# Altium PCB InvTrifasico.PcbDoc
Units mm, origin at the board's own origin, x right, y up, seen from the top; angles counter-clockwise.
Board outline 100 x 100 mm, 2 copper layers (Top Layer, Bottom Layer); 79 components, 43 nets, 284 pads, 0 vias.
Unrouted connection lines stored in the file: 12.
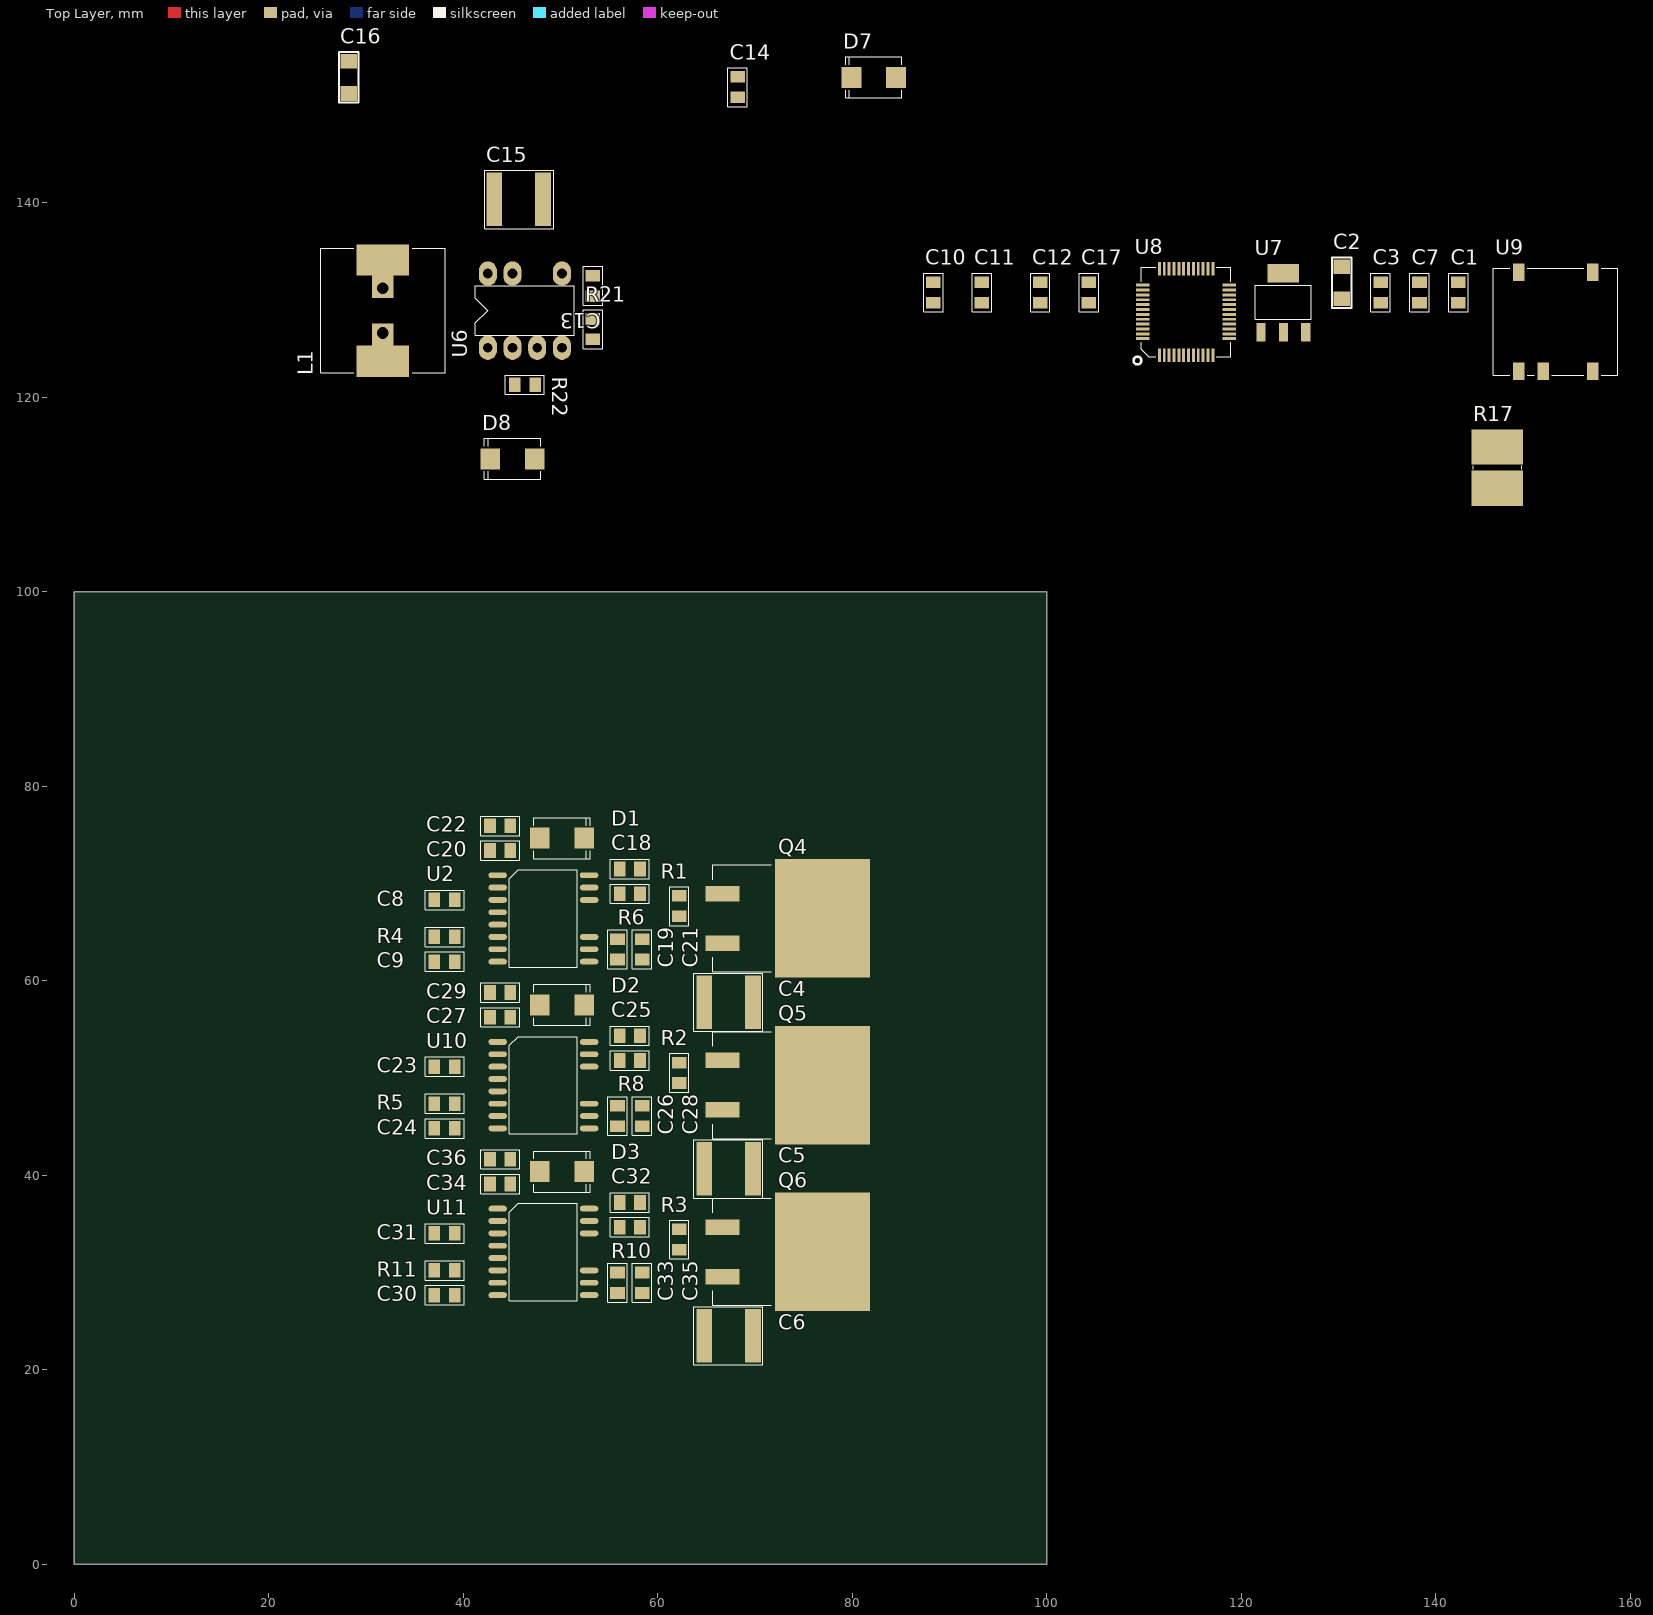
[diagram p0: Top Layer view]
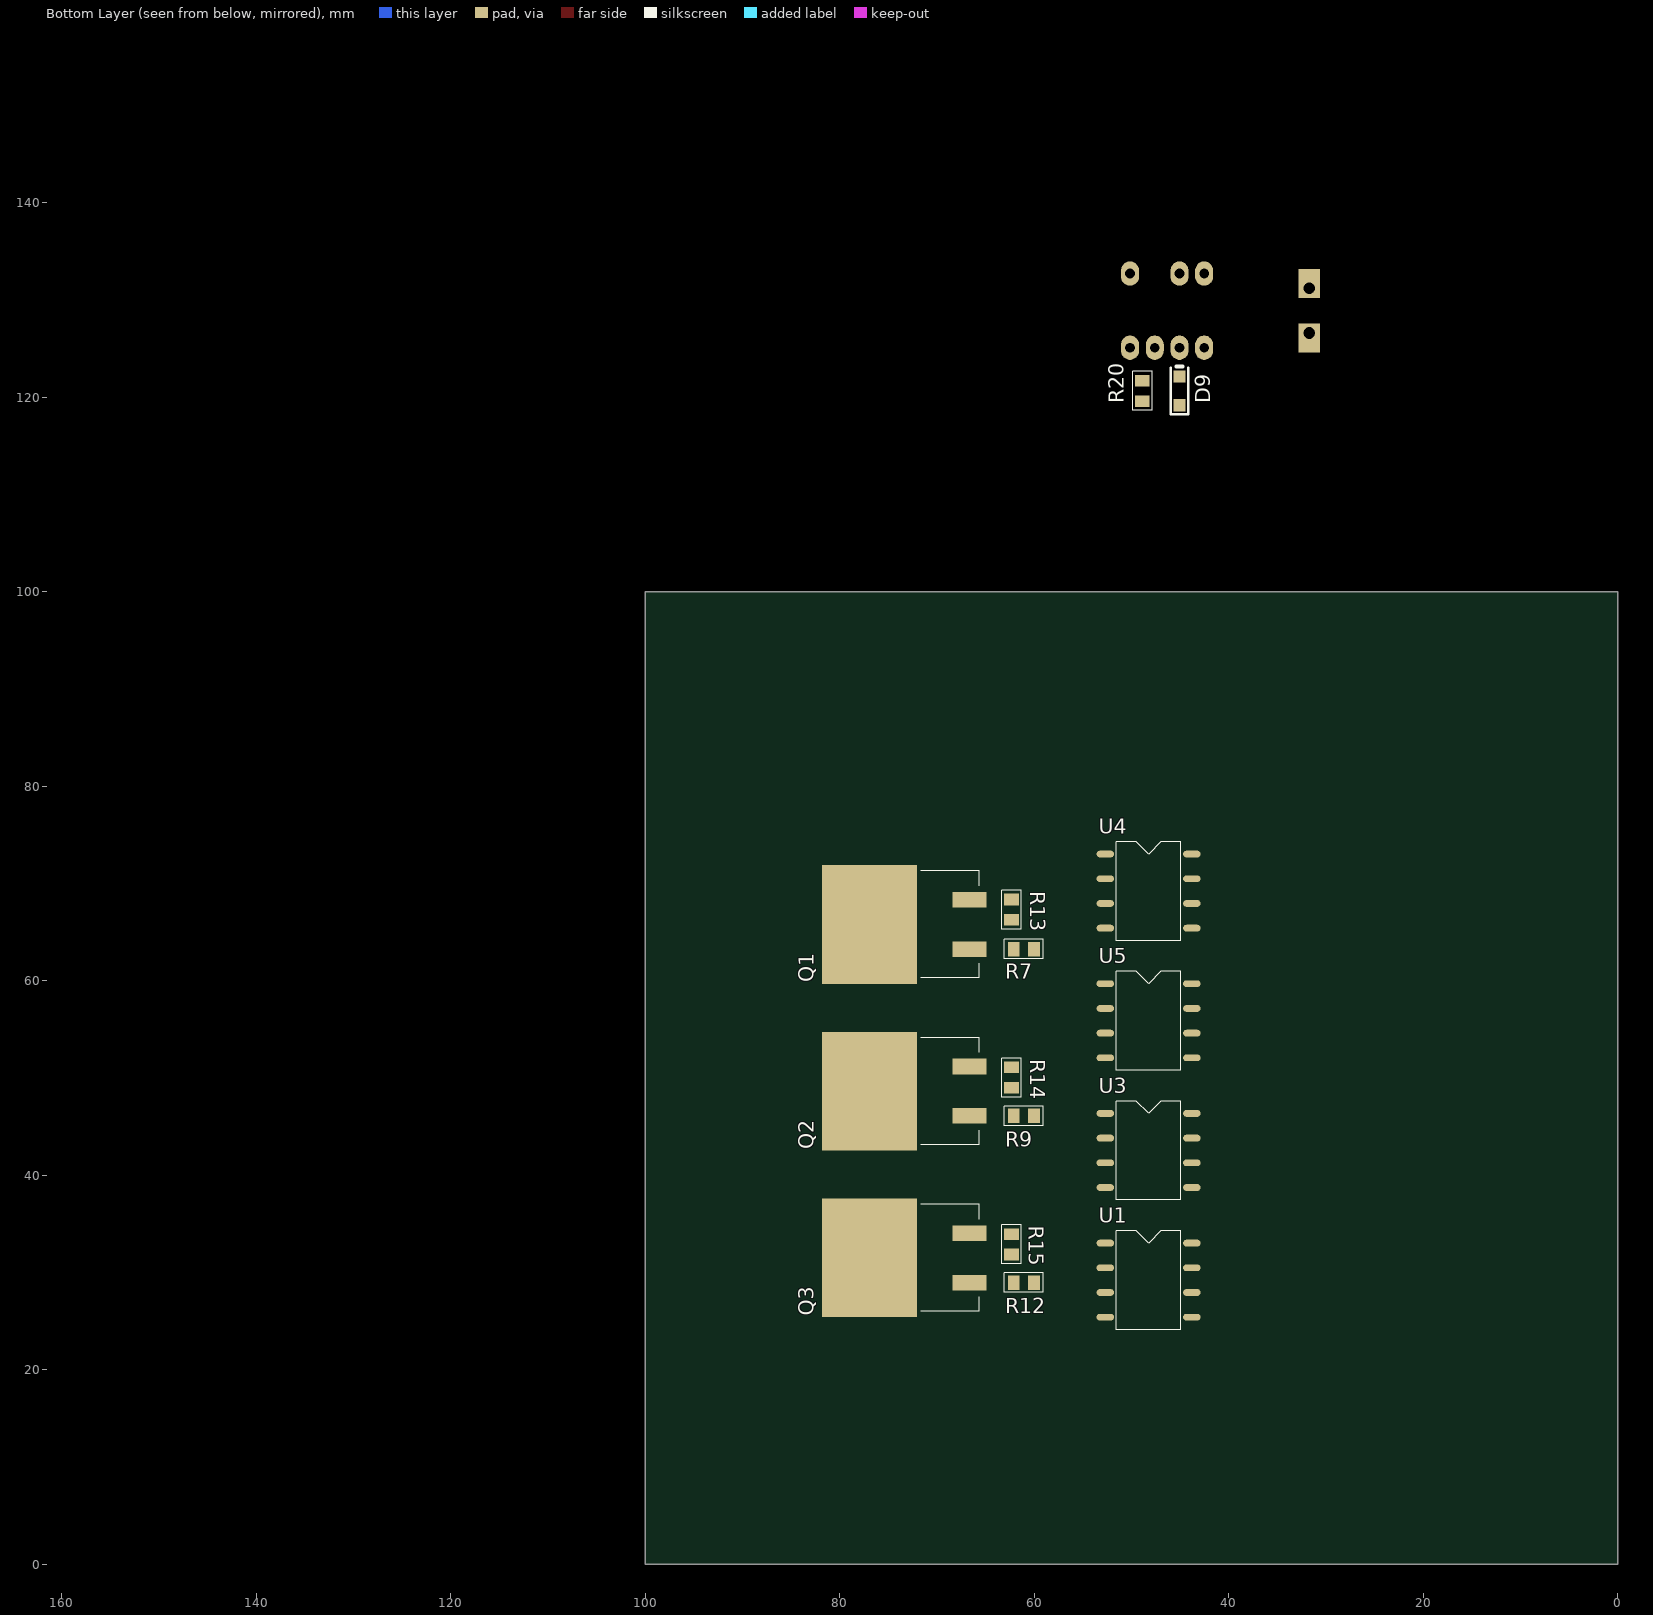
[diagram p1: Bottom Layer view, seen from below]

## Layer stack, top to bottom
Top Solder: solder mask 0.0102, Solder Resist, Dk 3.5
Top Layer: signal copper 0.0356
Dielectric 1: dielectric 0.32, FR-4, Dk 4.8
Bottom Layer: signal copper 0.0356
Bottom Solder: solder mask 0.0102, Solder Resist, Dk 3.5

## Board outline
0,0 100,0 100,100 0,100

## Design rules (kind name [scope] priority, off if disabled: settings)
Clearance [All] p1: gap=0.254 ignorepadtopadclearanceinfootprint=FALSE except(0: Arc-Hole Track-Hole SMDPad-Hole THPad-Hole Via-Hole Fill-Hole Poly-Hole Region-Hole Text-Hole)
PolygonConnect [All] p1: connectstyle=Relief reliefconductorwidth=0.254 reliefentries=4 polygonreliefangle="90 Angle" airgapwidth=0.254
RoutingVias [All] p1: holewidth=0.711 width=1.27 viastyle="Through Hole" minholewidth=0.711 minwidth=1.27 maxholewidth=0.711 maxwidth=1.27
SolderMaskExpansion [All] p1: expansion=0.102
Width [All] p1: maxlimit=0.254 minlimit=0.254 preferedwidth=0.254
30 further rules are at their usual default settings.

## Classes and differential pairs
component class Signal: C1 C2 C3 C7 C10 C11 C12 C17 U7 U8 U9
component class Power: C4 C5 C6 C8 C9 C13 C14 C15 C16 C18 C19 C20 C21 C22 C23 C24 C25 C26 C27 C28 C29 C30 C31 C32 C33 C34 C35 C36 D1 D2 D3 D7 D8 D9 L1 Q1 Q2 Q3 Q4 Q5 Q6 R1 R2 R3 R4 R5 R6 R7 R8 R9 R10 R11 R12 R13 R14 R15 R17 R20 R21 R22 U1 U2 U3 U4 U5 U6 U10 U11

## Components (designator, comment, footprint, x,y, rotation, side; value= is the part's Value field where it differs from the comment)
C1 "10u" C0805 142.35,130.77 r90 top
C2 "10u" C1206 130.35,131.77 r90 top
C3 "10u" C0805 134.35,130.77 r90 top
C4 "1uF" C_HIGH_V 67.31,57.785 r180 top
C5 "1uF" C_HIGH_V 67.31,40.64 r180 top
C6 "1uF" C_HIGH_V 67.31,23.495 r180 top
C7 "10u" C0805 138.35,130.77 r90 top
C8 "100n" C0805 38.1,68.31 r180 top
C9 "100n" C0805 38.1,61.96 r180 top
C10 "100n" C0805 88.35,130.77 r90 top
C11 "100n" C0805 93.35,130.77 r90 top
C12 "100n" C0805 99.35,130.77 r90 top
C13 "100n" C0805 53.34,131.445 r270 top
C14 "100n" C0805 68.225,151.89 r90 top
C15 "1uF" C_HIGH_V 45.72,140.335 r0 top
C16 "10u" C1206 28.225,152.89 r90 top
C17 "100n" C0805 104.35,130.77 r90 top
C18 "???" C0805 57.15,71.485 r0 top
C19 "100n" C0805 55.88,63.23 r270 top
C20 "100n" C0805 43.815,73.39 r180 top
C21 "10u" C0805 58.42,63.23 r270 top
C22 "10u" C0805 43.815,75.93 r180 top
C23 "100n" C0805 38.1,51.165 r180 top
C24 "100n" C0805 38.1,44.815 r180 top
C25 "???" C0805 57.15,54.34 r0 top
C26 "100n" C0805 55.88,46.085 r270 top
C27 "100n" C0805 43.815,56.245 r180 top
C28 "10u" C0805 58.42,46.085 r270 top
C29 "10u" C0805 43.815,58.785 r180 top
C30 "100n" C0805 38.1,27.67 r180 top
C31 "100n" C0805 38.1,34.02 r180 top
C32 "???" C0805 57.15,37.195 r0 top
C33 "100n" C0805 55.88,28.94 r270 top
C34 "100n" C0805 43.815,39.1 r180 top
C35 "10u" C0805 58.42,28.94 r270 top
C36 "10u" C0805 43.815,41.64 r180 top
D1 "VS-3EMU06-M3/5AT" DO-214AC 50.165,74.66 r180 top
D2 "VS-3EMU06-M3/5AT" DO-214AC 50.165,57.515 r180 top
D3 "VS-3EMU06-M3/5AT" DO-214AC 50.165,40.37 r180 top
D7 "VS-3EMU06-M3/5AT" DO-214AC 82.225,152.89 r0 top
D8 "VS-3EMU06-M3/5AT" DO-214AC 45.085,113.665 r0 top
D9 "MBR140SFT3G" SOD-123FL 45.085,120.65 r270 bottom
L1 "370 uH" IND_370u 31.75,128.905 r90 top
Q1 "STGB30H60DFB" D2PAK 66.675,65.786 r90 bottom
Q2 "STGB30H60DFB" D2PAK 66.675,48.641 r90 bottom
Q3 "STGB30H60DFB" D2PAK 66.675,31.496 r90 bottom
Q4 "STGB30M65DF2" D2PAK 66.675,66.405 r270 top
Q5 "STGB30M65DF2" D2PAK 66.675,49.26 r270 top
Q6 "STGB30M65DF2" D2PAK 66.675,32.115 r270 top
R1 "20k" R0805 62.23,67.675 r90 top
R2 "20k" R0805 62.23,50.53 r90 top
R3 "20k" R0805 62.23,33.385 r90 top
R4 "8k2" R0805 38.1,64.5 r0 top
R5 "8k2" R0805 38.1,47.355 r0 top
R6 "22R" R0805 57.15,68.945 r0 top
R7 "22R" R0805 61.087,63.246 r0 bottom
R8 "22R" R0805 57.15,51.8 r0 top
R9 "22R" R0805 61.087,46.101 r0 bottom
R10 "22R" R0805 57.15,34.655 r0 top
R11 "8k2" R0805 38.1,30.21 r0 top
R12 "22R" R0805 61.087,28.956 r0 bottom
R13 "20k" R0805 62.357,67.31 r270 bottom
R14 "20k" R0805 62.357,50.038 r270 bottom
R15 "20k" R0805 62.357,32.893 r270 bottom
R17 "0.03R / 7W" R2818 146.35,112.77 r90 top
R20 "8k2" R0805 48.895,120.65 r270 bottom
R21 "3k9" R0805 53.34,127 r90 top
R22 "2k2" R0805 46.355,121.285 r0 top
U1 "SI8920AC" 8_DIP_SMD 48.26,29.21 r180 bottom
U2 "SI8233xD-D-IS3" "SOIC-16 Wide (14-pins)" 48.26,66.405 r0 top
U3 "SI8920AC" 8_DIP_SMD 48.26,42.545 r180 bottom
U4 "SI8920BC" 8_DIP_SMD 48.26,69.215 r180 bottom
U5 "SI8920BC" 8_DIP_SMD 48.26,55.88 r180 bottom
U6 "VIPER26HN" 7_DIP 46.355,128.905 r90 top
U7 "MCP1825ST-3302E/DB" SOT-223-3 124.35,132.77 r0 top
U8 "STM32L433CCT6" LQFP-48 114.35,128.77 r0 top
U9 "R1SE-1505/H2-R" R1SE-1505/H2-R 152.35,127.77 r0 top
U10 "SI8233xD-D-IS3" "SOIC-16 Wide (14-pins)" 48.26,49.26 r0 top
U11 "SI8233xD-D-IS3" "SOIC-16 Wide (14-pins)" 48.26,32.115 r0 top

## Footprints (in the part's own frame and the unit in brackets; to place one, negate y for a bottom-side part, rotate by r counter-clockwise, add the part's x,y. Pads: shape width x height; smd on the part's side, far side on the other; paste and mask are expansions set on the pad)
7_DIP [mm]
  oval 2.5x1.85 hole 1 mask+0.05: 1(-3.81,3.81) 2(-3.81,1.27) 3(-3.81,-1.27) 4(-3.81,-3.81) 5(3.81,-3.81) 7(3.81,1.27) 8(3.81,3.81)
  silkscreen extent -2.54,-5.08 2.54,5.08, body extent -3.94,-4.6 3.93,4.6, height 3.85
8_DIP_SMD [mm]
  oval 1.8x0.7 smd mask+0.05: 1(-4.45,3.81) 2(-4.45,1.27) 3(-4.45,-1.27) 4(-4.45,-3.81) 5(4.45,-3.81) 6(4.45,-1.27) 7(4.45,1.27) 8(4.45,3.81)
  silkscreen extent -3.3,-5.08 3.3,5.08, body extent -4.95,-4.95 4.95,4.95, height 4.35
C0805 [mm] "Chip Resistor, 2-Leads, Body 2,00x1,25mm, IPC Medium Density"
  rect 1.2x1.5 smd: 1(-1.05,0) 2(1.05,0)
  silkscreen extent -2,-1 2,1, body extent -1,-0.6 1,0.6, height 1.2
C1206 [mm]
  rect 1.52x1.7 smd: 1(-1.65,0) 2(1.65,0)
  silkscreen extent -2.6,-1 2.6,1, body extent -1.6,-0.8 1.6,0.8, height 1
C_HIGH_V [mm]
  rect 1.6x5.5 smd: 1(-2.5,0) 2(2.5,0)
  silkscreen extent -3.5,-3 3.6,3, body extent -3.2,-2.6 3.2,2.6, height 4.8
D2PAK [mm]
  rect 1.6x3.5 smd: 1(-2.54,0) 3(2.54,0)
  rect 12.2x9.75 smd: 2(0,10.275)
  silkscreen extent -5.5,-1 5.5,5, body extent -4.91,-0.56 4.91,14.04, height 4.22
DO-214AC [mil]
  rect 80x85 smd: 1(-90,0) 2(90,0)
  silkscreen extent -114,-83 114,83, body extent -108,-77 108,77, height 96
IND_370u [mm]
  rect 3.2x5.4 smd: 1(-5.2,0) 2(5.2,0)
  rect 3x2.2 hole 1.2 copper offset -0.5,0: 1(-2.3,0)
  rect 3x2.2 hole 1.2 copper offset 0.5,0: 2(2.3,0)
  silkscreen extent -6.4,-6.4 6.4,6.4, body extent -6.25,-6.25 6.25,6.25, height 7.5
LQFP-48 [mm]
  rect 0.3x1.4 smd mask+0.05: 1(-2.75,-4.45) 2(-2.25,-4.45) 3(-1.75,-4.45) 4(-1.25,-4.45) 5(-0.75,-4.45) 6(-0.25,-4.45) 7(0.25,-4.45) 8(0.75,-4.45) 9(1.25,-4.45) 10(1.75,-4.45) 11(2.25,-4.45) 12(2.75,-4.45) 25(2.75,4.45) 25(2.75,4.45) 26(2.25,4.45) 27(1.75,4.45) 28(1.25,4.45) 29(0.75,4.45) 30(0.25,4.45) 31(-0.25,4.45) 32(-0.75,4.45) 33(-1.25,4.45) 34(-1.75,4.45) 35(-2.25,4.45) 36(-2.75,4.45)
  rect 1.4x0.3 smd mask+0.05: 13(4.45,-2.75) 14(4.45,-2.25) 15(4.45,-1.75) 16(4.45,-1.25) 17(4.45,-0.75) 18(4.45,-0.25) 19(4.45,0.25) 20(4.45,0.75) 21(4.45,1.25) 22(4.45,1.75) 23(4.45,2.25) 24(4.45,2.75) 37(-4.45,2.75) 37(-4.45,2.75) 38(-4.45,2.25) 39(-4.45,1.75) 40(-4.45,1.25) 41(-4.45,0.75) 42(-4.45,0.25) 43(-4.45,-0.25) 44(-4.45,-0.75) 45(-4.45,-1.25) 46(-4.45,-1.75) 47(-4.45,-2.25) 48(-4.45,-2.75)
  silkscreen extent -5.4,-5.4 4.6,4.6, body extent -4.57,-4.57 4.57,4.57, height 1.62
R1SE-1505/H2-R [mm]
  rect 1.2x1.8 smd: 1(-3.81,-5.1) 2(-1.27,-5.1) 4(3.81,-5.1) 5(3.81,5.1) 8(-3.81,5.1)
  silkscreen extent -6.4,-5.5 6.4,5.5
R0805 [mm] "Chip Resistor, 2-Leads, Body 2,00x1,25mm, IPC Medium Density"
  rect 1.2x1.5 smd: 1(-1.05,0) 2(1.05,0)
  silkscreen extent -2,-1 2,1, body extent -1,-0.63 1,0.62, height 0.5
R2818 [mm]
  rect 3.63x5.33 smd mask+0.05: 1(-2.12,0) 2(2.12,0)
  silkscreen extent -0.2,-2.5 0.2,2.5, body extent -3.55,-2.3 3.55,2.3, height 1.5
SOD-123FL [mm]
  rect 1.25x1.22 smd: 1(-1.475,0) 2(1.475,0)
  silkscreen extent -2.5,-0.9 2.4,0.9, body extent -1.8,-0.83 1.8,0.82, height 0.95
"SOIC-16 Wide (14-pins)" [mm]
  oval 1.9x0.6 smd: 1(-4.7,4.445) 2(-4.7,3.175) 3(-4.7,1.905) 4(-4.7,0.635) 5(-4.7,-0.635) 6(-4.7,-1.905) 7(-4.7,-3.175) 8(-4.7,-4.445) 9(4.7,-4.445) 10(4.7,-3.175) 11(4.7,-1.905) 14(4.7,1.905) 15(4.7,3.175) 16(4.7,4.445)
  silkscreen extent -3.5,-5 3.5,5, body extent -5.08,-5.04 5.08,5.04, height 2
SOT-223-3 [mm]
  rect 0.95x1.9 smd: 1(-2.3,-6.1) 2(0,-6.1) 3(2.3,-6.1)
  rect 3.25x1.9 smd: 2(0,0)
  silkscreen extent -2.88,-4.75 2.88,-1.25, body extent -3.22,-6.56 3.27,0.51, height 1.6

## Part data
C1 C3 C7 C8 C9 C10 C11 C12 C13 C14 C17 C18 C19 C20 C21 C22 C23 C24 C25 C26 C27 C28 C29 C30 C31 C32 C33 C34 C35 C36: library part CAP_0805, "0805 Capacitor"
C2 C16: library part CAP_1206_10u, "CAP CER 10UF 35V X5R 1206", Manufacturer=Murata, Operating Temperature="-55°C ~ 85°C", Package / Case="1206 (3216 Metric)", Supplier 1 Part Number=GRM319R6YA106MA12D, Supplier 2 Part Number=490-9965-2-ND, Temperature Coefficient=X5R, Tolerance=±20%, Voltage - Rated=35V, Category=Capacitors, Mounting Type="Surface Mount, MLCC", Packaging="Tape & Reel (TR)", Size/Dimension="0.126\" L x 0.063\" W (3.20mm x 1.60mm)", Supplier 1=Arrow, Supplier 2=Digi-Key
C4 C5 C6 C15: library part CAP_HIGH_VOLAGE, "CAP CER 1UF 630V X7T STACKED SMD", Manufacturer="Murata Electronics North America", Manufacturer Part Number=KC355TD7LQ105MV01K, Operating Temperature="-55°C ~ 125°C", Package / Case="Stacked SMD, 2 J-Lead", Ratings=AEC-Q200, Supplier Part Number 1=KC355TD7LQ105MV01K-ND, Temperature Coefficient=X7T, Tolerance=±20%, Voltage - Rated=630V, Applications=Automotive, Category=Capacitors, ComponentLink1Description=http://search.murata.co.jp/Ceramy/image/img/A01X/G101/ENG/KC355_V01_E.pdf, ComponentLink1URL=http://search.murata.co.jp/Ceramy/image/img/A01X/G101/ENG/KC355_V01_E.pdf, Failure Rate=-, Features=-, Height - Seated (Max)=-, Lead Spacing=-, Lead Style=J-Lead, Mounting Type="Surface Mount, MLCC", Packaging="Tape & Reel (TR)", Part Status=Active, Pricing 1="1000=1.78126 (USD)", RoHS="RoHS Compliant", Size / Dimension="0.240\" L x 0.209\" W (6.10mm x 5.30mm)", Stock 1=0, Supplier 1=Digi-Key, Thickness (Max)="0.197\" (5.00mm)"
D1 D2 D3 D7 D8: "DIODE GEN PURP 600V 3A DO214AC", Capacitance @ Vr, F=-, Current - Average Rectified (Io)=3A, Manufacturer="Vishay Semiconductor Diodes Division", Operating Temperature - Junction="-55°C ~ 175°C", Package / Case="DO-214AC, SMA", Supplier Device Package="DO-214AC (SMA)", Supplier Part Number 1=VS-3EMU06-M3/5ATGICT-ND, Category="Discrete Semiconductor Products", ComponentLink1Description=http://www.vishay.com/docs/93993/vs-3emu06-m3.pdf, ComponentLink1URL=http://www.vishay.com/docs/93993/vs-3emu06-m3.pdf, Diode Type=Standard, Manufacturer Part Number=VS-3EMU06-M3/5AT, Mounting Type="Surface Mount", Packaging="Cut Tape (CT)", Part Status=Active, Pricing 1="1=0.44, 10=0.374, 25=0.3492, 100=0.2795, 250=0.25956, 500=0.21962, 1000=0.1697, 2500=0.15473 (USD)", RoHS="RoHS Compliant", Speed="Fast Recovery =< 500ns, > 200mA (Io)", Stock 1=0, Supplier 1=Digi-Key
D9: "DIODE SCHOTTKY 550mV @ 1A, 40V, SOD123L", Current - Average Rectified (Io)=1A, Current - Reverse Leakage @ Vr="500µA @ 40V", Manufacturer="ON Semiconductor", Manufacturer Part Number=MBR140SFT1G, Operating Temperature - Junction="-55°C ~ 125°C", Package / Case=SOD-123F, Supplier 2 Part Number=MBR140SFT1GOSDKR-ND, Supplier Device Package=SOD-123L, Voltage - DC Reverse (Vr) (Max)=40V, Voltage - Forward (Vf) (Max) @ If="550mV @ 1A", Diode Type=Schottky, Mounting Type="Surface Mount", Packaging="Cut Tape (CT)", Supplier 1=Arrow, Supplier 1 Part Number=MBR140SFT3G, Supplier 2=Digi-Key
L1: library part IND_370u, "390µH Shielded Wirewound Inductor 1.6A 680 mOhm Max Nonstandard", DC Resistance (DCR)="680 mOhm Max", Manufacturer="Bourns Inc.", Manufacturer Part Number=PM127SH-391M-RC, Operating Temperature="-40°C ~ 125°C", Package / Case=Nonstandard, Q @ Freq="20 @ 796kHz", Ratings=-, Supplier Part Number 1=PM127SH-391M-RC-ND, Tolerance=±20%, Category="Inductors, Coils, Chokes", ComponentLink1Description=http://www.bourns.com/docs/Product-Datasheets/PM127SH_SERIES.pdf, ComponentLink1URL=http://www.bourns.com/docs/Product-Datasheets/PM127SH_SERIES.pdf, Height - Seated (Max)="0.315\" (8.00mm)", Material - Core=Ferrite, Mounting Type="Surface Mount", Packaging="Tape & Reel (TR)", Part Status=Active, Pricing 1="400=0.62475 (USD)", RoHS="RoHS Compliant", Shielding=Shielded, Size / Dimension="0.492\" L x 0.492\" W (12.50mm x 12.50mm)", Stock 1=0, Supplier 1=Digi-Key, Supplier Device Package=-, Type=Wirewound
Q1 Q2 Q3: "TRENCH GATE FIELD-STOP IGBT, HB", Manufacturer=STMicroelectronics, Operating Temperature="-55°C ~ 175°C (TJ)", Package / Case="TO-263-3, D²Pak (2 Leads + Tab), TO-263AB", Supplier Device Package=D2PAK, Supplier Part Number 1=497-16518-1-ND, Category="Discrete Semiconductor Products", ComponentLink1Description=http://www.st.com/content/ccc/resource/technical/document/datasheet/56/6d/c4/33/3a/aa/4a/fc/DM00125119.pdf/files/DM00125119.pdf/jcr:content/translations/en.DM00125119.pdf, ComponentLink1URL=http://www.st.com/content/ccc/resource/technical/document/datasheet/56/6d/c4/33/3a/aa/4a/fc/DM00125119.pdf/files/DM00125119.pdf/jcr:content/translations/en.DM00125119.pdf, IGBT Type="Trench Field Stop", Input Type=Standard, Manufacturer Part Number=STGB30H60DFB, Mounting Type="Surface Mount", Packaging="Cut Tape (CT)", Part Status=Active, Pricing 1="1=2.81, 10=2.538, 100=2.0394, 500=1.5862 (USD)", RoHS="RoHS Compliant", Stock 1=0, Supplier 1=Digi-Key, Switching Energy="383µJ (on), 293µJ (off)", Td (on/off) @ 25°C=37ns/146ns, Test Condition="400V, 30A, 10 Ohm, 15V", Vce(on) (Max) @ Vge, Ic="2V @ 15V, 30A"
Q4 Q5 Q6: "IGBT 650V 30A D2PAK", Manufacturer=STMicroelectronics, Operating Temperature="-55°C ~ 175°C (TJ)", Package / Case="TO-263-3, D²Pak (2 Leads + Tab), TO-263AB", Supplier Device Package=D2PAK, Supplier Part Number 1=497-15843-1-ND, Category="Discrete Semiconductor Products", ComponentLink1Description=http://www.st.com/content/ccc/resource/technical/document/datasheet/f7/d5/65/0d/e4/ad/41/57/DM00157913.pdf/files/DM00157913.pdf/jcr:content/translations/en.DM00157913.pdf, ComponentLink1URL=http://www.st.com/content/ccc/resource/technical/document/datasheet/f7/d5/65/0d/e4/ad/41/57/DM00157913.pdf/files/DM00157913.pdf/jcr:content/translations/en.DM00157913.pdf, IGBT Type="Trench Field Stop", Input Type=Standard, Manufacturer Part Number=STGB30M65DF2, Mounting Type="Surface Mount", Packaging="Cut Tape (CT)", Part Status=Active, Pricing 1="1=4.1, 10=3.681, 100=3.0158, 500=2.56726 (USD)", RoHS="RoHS Compliant", Stock 1=1013, Supplier 1=Digi-Key, Switching Energy="300µJ (on), 960µJ (off)", Td (on/off) @ 25°C=31.6ns/115ns, Test Condition="400V, 30A, 10 Ohm, 15V", Vce(on) (Max) @ Vge, Ic="2V @ 15V, 30A"
R1 R2 R3 R4 R5 R6 R7 R8 R9 R10 R11 R12 R13 R14 R15 R20 R21 R22: library part RES_0805
R17: library part res_2818, "RES 0.003 OHM 1% 7W 2818", Manufacturer="Vishay Dale", Manufacturer Part Number=WSHM28183L000FEA, Operating Temperature="-65°C ~ 170°C", Package / Case=Nonstandard, Power (Watts)=7W, Supplier Device Package=2818, Supplier Part Number 1=541-2619-1-ND, Temperature Coefficient=±200ppm/°C, Tolerance=±1%, Category=Resistors, ComponentLink1Description=http://www.vishay.com/docs/30188/wshm2818.pdf, ComponentLink1URL=http://www.vishay.com/docs/30188/wshm2818.pdf, Composition="Metal Element", Failure Rate=-, Features="Automotive AEC-Q200, Current Sense, Moisture Resistant, Pulse Withstanding", Height - Seated (Max)="0.069\" (1.75mm)", Packaging="Cut Tape (CT)", Part Status=Active, Pricing 1="1=1.86, 10=1.652, 25=1.5316, 50=1.4414, 100=1.2613, 250=1.08108, 500=0.9009, 1000=0.78078 (USD)", RoHS="RoHS Compliant", Size / Dimension="0.280\" L x 0.181\" W (7.10mm x 4.60mm)", Stock 1=954, Supplier 1=Digi-Key
U1 U3: "IC OP AMP ISOLATION 8DIP-GW", Current - Supply=4.2mA, Manufacturer="Silicon Labs", Manufacturer Part Number=SI8920AC-IP, Operating Temperature="-40°C ~ 125°C", Package / Case="8-SMD, Gull Wing", Supplier Device Package="8-DIP Gull Wing", Supplier Part Number 1=336-3328-5-ND, Voltage - Supply, Single/Dual (±)="3 V ~ 5.5 V", Amplifier Type=Isolation, Category="Integrated Circuits (ICs)", ComponentLink1Description=http://www.silabs.com/documents/public/data-sheets/si8920-datasheet.pdf, ComponentLink1URL=http://www.silabs.com/documents/public/data-sheets/si8920-datasheet.pdf, Mounting Type="Surface Mount", Output Type=Differential, Packaging=Tube, Part Status=Active, Pricing 1="1=3.51, 25=3.3844, 100=3.2544, 1000=3.19789 (USD)", RoHS="RoHS Compliant", Slew Rate=-, Stock 1=595, Supplier 1=Digi-Key
U2 U10 U11: "ISOLATED GATE DRIVER, 8 MM CREEP", Current - Output High, Low="2A, 4A", Current - Peak Output=4A, Manufacturer="Silicon Labs", Manufacturer Part Number=SI8233AD-D-IS3, Operating Temperature="-40°C ~ 125°C", Package / Case="14-SOIC (0.295\", 7.50mm Width)", Supplier Device Package=14-SOIC, Supplier Part Number 1=336-4258-ND, Voltage - Forward (Vf) (Typ)=-, Voltage - Isolation=5000Vrms, Voltage - Supply="6.5 V ~ 24 V", Approvals="CQC, CSA, UR, VDE", Category=Isolators, Common Mode Transient Immunity (Min)=45kV/µs, ComponentLink1Description=https://www.silabs.com/documents/public/data-sheets/Si823x.pdf, ComponentLink1URL=https://www.silabs.com/documents/public/data-sheets/Si823x.pdf, Mounting Type="Surface Mount", Packaging=Tube, Part Status=Active, Pricing 1="1=3.37, 25=3.2436, 100=3.1188, 1000=2.8125 (USD)", Propagation Delay tpLH / tpHL (Max)="60ns, 60ns", Pulse Width Distortion (Max)=5.6ns, Rise / Fall Time (Typ)="12ns, 12ns", RoHS="RoHS Compliant", Stock 1=76, Supplier 1=Digi-Key, Technology="Capacitive Coupling"
U4 U5: "IC OP AMP ISOLATION 8DIP-GW", Current - Supply=4.2mA, Manufacturer="Silicon Labs", Manufacturer Part Number=SI8920BC-IP, Operating Temperature="-40°C ~ 125°C", Package / Case="8-SMD, Gull Wing", Supplier Device Package="8-DIP Gull Wing", Supplier Part Number 1=336-3329-5-ND, Voltage - Supply, Single/Dual (±)="3 V ~ 5.5 V", Amplifier Type=Isolation, Category="Integrated Circuits (ICs)", ComponentLink1Description=http://www.silabs.com/documents/public/data-sheets/si8920-datasheet.pdf, ComponentLink1URL=http://www.silabs.com/documents/public/data-sheets/si8920-datasheet.pdf, Mounting Type="Surface Mount", Output Type=Differential, Packaging=Tube, Part Status=Active, Pricing 1="1=2.93, 25=2.8204, 100=2.712, 1000=2.65553 (USD)", RoHS="RoHS Compliant", Slew Rate=-, Stock 1=3602, Supplier 1=Digi-Key
U6: "IC OFFLINE CONV PWM 800V 7-DIP", Base Part Number=VIPER26, Frequency - Switching=115kHz, Manufacturer=STMicroelectronics, Operating Temperature="-40°C ~ 150°C (TJ)", Package / Case="8-DIP (0.300\", 7.62mm), 7 Leads", Supplier Device Package=7-DIP, Supplier Part Number 1=497-10743-5-ND, Voltage - Breakdown=800V, Voltage - Supply (Vcc/Vdd)="11.5 V ~ 23.5 V", Category="Integrated Circuits (ICs)", ComponentLink1Description=http://www.st.com/content/ccc/resource/technical/document/datasheet/cd/d4/93/15/03/e1/40/81/CD00279018.pdf/files/CD00279018.pdf/_jcr_content/translations/en.CD00279018.pdf, ComponentLink1URL=http://www.st.com/content/ccc/resource/technical/document/datasheet/cd/d4/93/15/03/e1/40/81/CD00279018.pdf/files/CD00279018.pdf/_jcr_content/translations/en.CD00279018.pdf, Control Features=-, Duty Cycle=70%, Fault Protection="Current Limiting, Over Temperature", Internal Switch(s)=Yes, Manufacturer Part Number=VIPER26HN, Mounting Type="Through Hole", Output Isolation=Either, Packaging=Tube, Part Status=Active, Pricing 1="1=1.1, 10=0.979, 100=0.7636, 500=0.6308, 1000=0.498 (USD)", RoHS="RoHS Compliant", Stock 1=2903, Supplier 1=Digi-Key, Topology=Flyback
U7: "IC REG LIN 3.3V 500MA SOT223-3", Base Part Number=MCP1825S, Current - Output=500mA, Manufacturer="Microchip Technology", Manufacturer Part Number=MCP1825S-3302E/DB, Operating Temperature="-40°C ~ 125°C", Package / Case="TO-261-4, TO-261AA", Supplier Device Package=SOT-223-3, Supplier Part Number 1=MCP1825S-3302E/DB-ND, Voltage - Input (Max)=6V, Voltage - Output (Max)=-, Voltage - Output (Min/Fixed)=3.3V, Voltage Dropout (Max)="0.35V @ 500mA", Category="Integrated Circuits (ICs)", ComponentLink1Description=http://www.microchip.com/mymicrochip/filehandler.aspx?ddocname=en531698, ComponentLink1URL=http://www.microchip.com/mymicrochip/filehandler.aspx?ddocname=en531698, Control Features=-, Mounting Type="Surface Mount", Output Configuration=Positive, Output Type=Fixed, Packaging=Tube, Part Status=Active, Pricing 1="1=0.54, 25=0.456, 100=0.4134 (USD)", Protection Features="Over Temperature, Short Circuit, Under Voltage Lockout (UVLO)", PSRR="60dB (100Hz)", RoHS="RoHS Compliant", Stock 1=7442, Supplier 1=Digi-Key
U8: "IC MCU 32BIT 256KB FLASH 48LQFP", Manufacturer=STMicroelectronics, Operating Temperature="-40°C ~ 85°C (TA)", Package / Case=48-LQFP, Supplier Device Package="48-LQFP (7x7)", Supplier Part Number 1=497-16579-ND, Voltage - Supply (Vcc/Vdd)="1.71 V ~ 3.6 V", Category="Integrated Circuits (ICs)", ComponentLink1Description=http://www.st.com/content/ccc/resource/technical/document/datasheet/f7/a0/fc/27/24/4e/4f/3f/DM00257192.pdf/files/DM00257192.pdf/jcr:content/translations/en.DM00257192.pdf, ComponentLink1URL=http://www.st.com/content/ccc/resource/technical/document/datasheet/f7/a0/fc/27/24/4e/4f/3f/DM00257192.pdf/files/DM00257192.pdf/jcr:content/translations/en.DM00257192.pdf, Connectivity="CAN, I²C, IrDA, LIN, MMC/SD, QSPI, SAI, SPI, SWPMI, UART/USART, USB", Core Processor="ARM® Cortex®-M4", Core Size=32-Bit, Data Converters="A/D 10x12b, D/A 2x12b", EEPROM Size=-, Manufacturer Part Number=STM32L433CCT6, Oscillator Type=Internal, Packaging=Tray, Part Status=Active, Peripherals="Brown-out Detect/Reset, DMA, LCD, PWM, WDT", Pricing 1="1=5.85, 10=5.25, 100=4.3017, 500=3.66196, 1000=3.0884 (USD)", Program Memory Size="256KB (256K x 8)", Program Memory Type=FLASH, RAM Size="64K x 8", RoHS="RoHS Compliant", Speed=80MHz, Stock 1=0, Supplier 1=Digi-Key
U9: "CONV DC/DC 1W 15VIN 05VOUT", Current - Output (Max)=200mA, Manufacturer="Recom Power", Operating Temperature="-40°C ~ 100°C", Package / Case="8-SMD Module, 5 Leads", Supplier Part Number 1=945-2276-1-ND, Voltage - Input (Max)=16.5V, Voltage - Input (Min)=13.5V, Voltage - Output 1=5V, Voltage - Output 2=-, Applications="ITE (Commercial)", Category="Power Supplies - Board Mount", ComponentLink1Description=https://www.recom-power.com/pdf/Econoline/R1SE_H2.pdf, ComponentLink1URL=https://www.recom-power.com/pdf/Econoline/R1SE_H2.pdf, Efficiency=74%, Features=-, Manufacturer Part Number=R1SE-1505/H2-R, Mounting Type="Surface Mount", Packaging="Cut Tape (CT)", Part Status=Active, Pricing 1="1=3.86, 5=3.802, 10=3.749, 25=3.642, 50=3.4278, 100=3.3207, 250=3.2136 (USD)", RoHS="RoHS Compliant", Size / Dimension="0.50\" L x 0.42\" W x 0.26\" H (12.8mm x 10.7mm x 6.7mm)", Stock 1=508, Supplier 1=Digi-Key, Type="Isolated Module", Voltage - Output 3=-

## Nets (pads, with @x,y where several pads share a name; then routed paths per layer and width w, separated by ;. In a path a pad name is that pad's centre, name@x,y a point inside that pad or via, vN(x,y) a via of type N, cw(c..) or ccw(c..) an arc to the next point about the centre after c; other vN are vias at no path point)
+3V3_ISOL: C7.1 U7.3
+5V_ISOL: C1.1 C3.1 C8.1 C9.1 C10.1 C11.1 C12.1 C17.1 C23.1 C24.1 C30.1 C31.1 U2.3 U2.8 U7.1 U9.5 U10.3 U10.8 U11.3 U11.8
+15V_VDD: C2.1 C16.1 C19.1 C20.1 C21.1 C22.1 C26.1 C27.1 C28.1 C29.1 C33.1 C34.1 C35.1 C36.1 D1.2 D2.2 D3.2 D7.2 L1.2 U2.11 U9.1 U10.11 U11.11
ADI: U2.5
AHI: U2.1
AHO: Q4.1 R1.2 R6.2
AHO_R: R6.1 U2.15
ALI: U2.2
ALO: Q1.1 R7.2 R13.2
ALO_R: R7.1 U2.10
BDI: U10.5
BHI: U10.1
BHO: Q5.1 R2.2 R8.2
BHO_R: R8.1 U10.15
BLI: U10.2
BLO: Q2.1 R9.2 R14.2
BLO_R: R9.1 U10.10
CDI: U11.5
CHI: U11.1
CHO: Q6.1 R3.2 R10.2
CHO_R: R10.1 U11.15
CLI: U11.2
CLO: Q3.1 R12.2 R15.2
CLO_R: R12.1 U11.10
COM: Q1.3 Q2.3 Q3.3 R13.1 R14.1 R15.1 R17.2
NetC13_1: C13.1 U6.5
NetC13_2: C13.2 R21.2
NetC14_1: C14.1 D7.1 D9.2 R20.2
NetC18_1: C18.1 D1.1 U2.16
NetC25_1: C25.1 D2.1 U10.16
NetC32_1: C32.1 D3.1 U11.16
NetD9_1: D9.1 U6.2
NetR4_2: R4.2 U2.6
NetR5_2: R5.2 U10.6
NetR11_2: R11.2 U11.6
NetR20_1: R20.1 R22.2 U6.4
PGND: C2.2 C4.2 C5.2 C6.2 C15.2 C16.2 C19.2 C20.2 C21.2 C22.2 C26.2 C27.2 C28.2 C29.2 C33.2 C34.2 C35.2 C36.2 D8.2 R17.1 U2.9 U9.2 U10.9 U11.9
Phase_A: C18.2 Q1.2 Q4.3 R1.1 U2.14
Phase_B: C25.2 Q2.2 Q5.3 R2.1 U10.14
Phase_C: C32.2 Q3.2 Q6.3 R3.1 U11.14
SGND: C1.2 C3.2 C7.2 C8.2 C9.2 C10.2 C11.2 C12.2 C17.2 C23.2 C24.2 C30.2 C31.2 R4.1 R5.1 R11.1 U2.4 U7.2 U9.4 U10.4 U11.4
SW_NODE: C14.2 D8.1 L1.1 R21.1 R22.1 U6.1
VBUS: C4.1 C5.1 C6.1 C15.1 Q4.2 Q5.2 Q6.2 U6.7 U6.8
pads on no net: U1.1 U1.2 U1.3 U1.4 U1.5 U1.6 U1.7 U1.8 U2.7 U3.1 U3.2 U3.3 U3.4 U3.5 U3.6 U3.7 U3.8 U4.1 U4.2 U4.3 U4.4 U4.5 U4.6 U4.7 U4.8 U5.1 U5.2 U5.3 U5.4 U5.5 U5.6 U5.7 U5.8 U6.3 U8.1 U8.2 U8.3 U8.4 U8.5 U8.6 U8.7 U8.8 U8.9 U8.10 U8.11 U8.12 U8.13 U8.14 U8.15 U8.16 U8.17 U8.18 U8.19 U8.20 U8.21 U8.22 U8.23 U8.24 U8.25 U8.26 U8.27 U8.28 U8.29 U8.30 U8.31 U8.32 U8.33 U8.34 U8.35 U8.36 U8.37 U8.38 U8.39 U8.40 U8.41 U8.42 U8.43 U8.44 U8.45 U8.46 U8.47 U8.48 U9.8 U10.7 U11.7

## Keep-outs
Keep-Out Layer:
  lines w0.127: 0,0 0,100